# Altium PCB 15WFlyBack.PcbDoc
Units mm, origin at the board's own origin, x right, y up, seen from the top; angles counter-clockwise.
Board outline 88.01 x 41.4 mm, 2 copper layers (Top Layer, Bottom Layer); 49 components, 28 nets, 117 pads, 0 vias.
Unrouted connection lines stored in the file: 86.
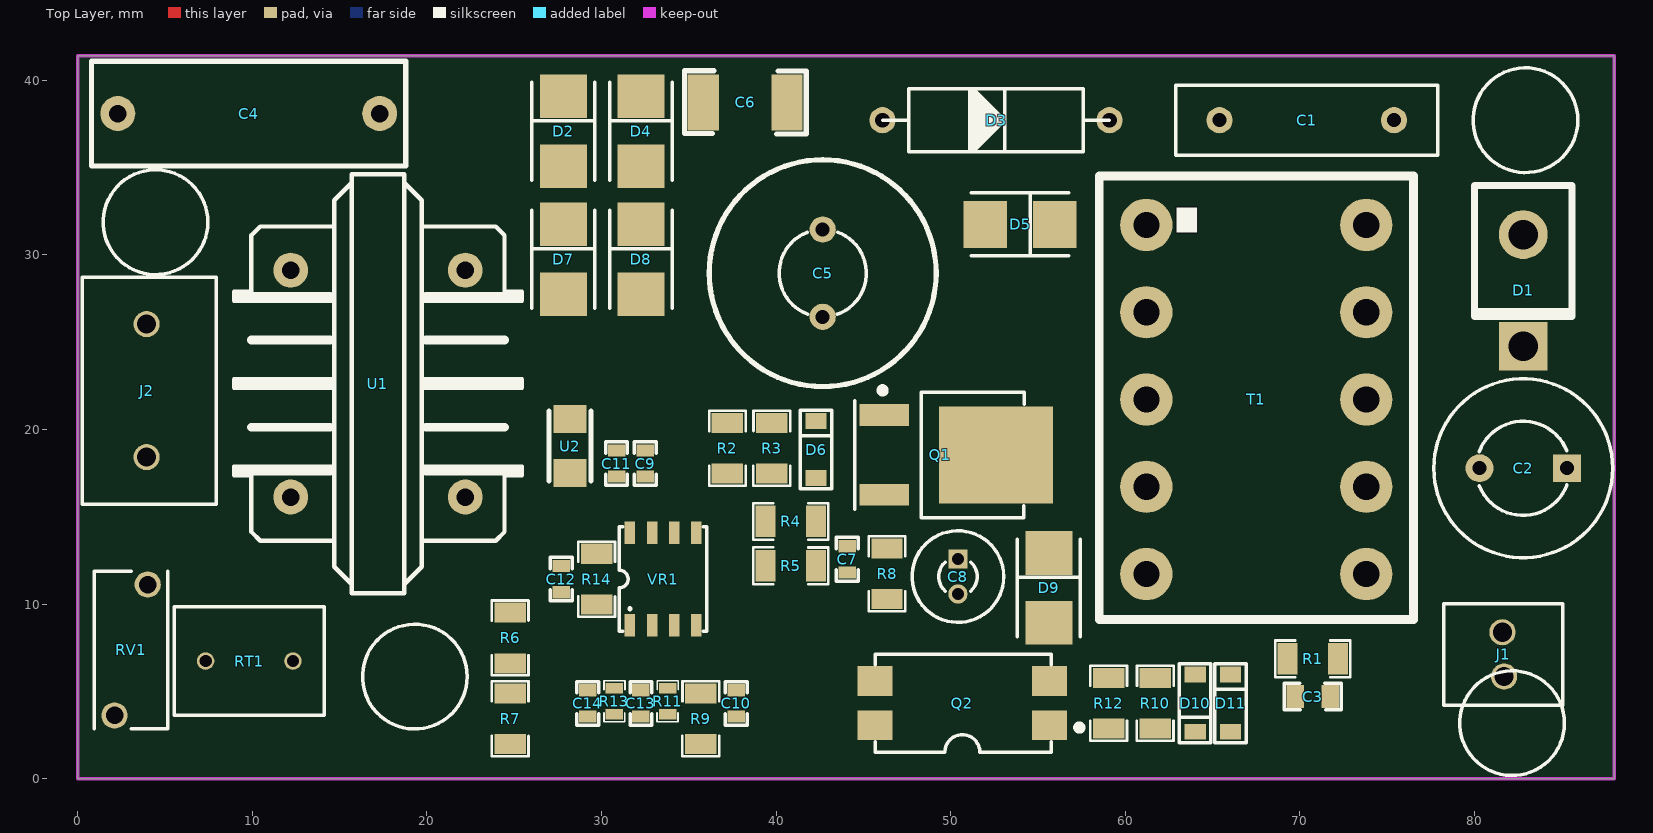
[diagram p0: Top Layer view]
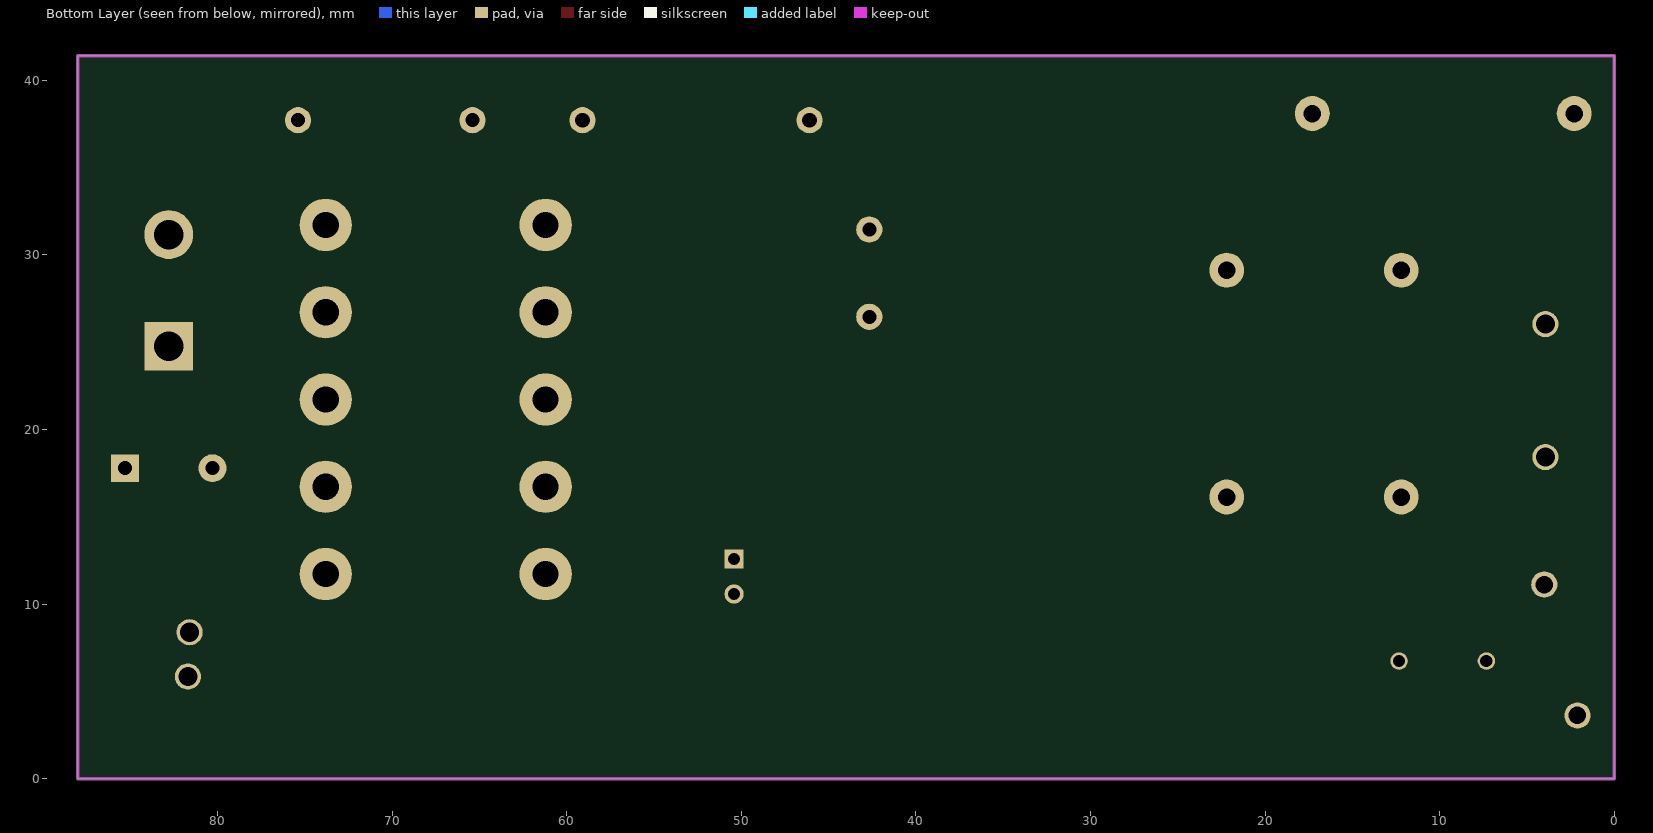
[diagram p1: Bottom Layer view, seen from below]

## Layer stack, top to bottom
Top Solder: solder mask 0.0102, Solder Resist, Dk 3.5
Top Layer: signal copper 0.0356
Dielectric 1: dielectric 0.32, FR-4, Dk 4.8
Bottom Layer: signal copper 0.0356
Bottom Solder: solder mask 0.0102, Solder Resist, Dk 3.5

## Board outline
0,0 88.011,0 88.011,41.402 0,41.402

## Design rules (kind name [scope] priority, off if disabled: settings)
Clearance GenelClearance [All] p1: gap=0.3 ignorepadtopadclearanceinfootprint=FALSE except(0: Arc-Hole Track-Hole SMDPad-Hole THPad-Hole Via-Hole Fill-Hole Poly-Hole Region-Hole Text-Hole)
Clearance NoNet [InNet('No Net')] p2: gap=0.6 ignorepadtopadclearanceinfootprint=FALSE except(0: Arc-Hole Track-Hole SMDPad-Hole THPad-Hole Via-Hole Fill-Hole Poly-Hole Region-Hole Text-Hole)
Clearance Pad-Pad [(IsPad or IsVia) vs (IsPad or IsVia)] p3: gap=0.6 ignorepadtopadclearanceinfootprint=FALSE except(0: Arc-Hole Track-Hole SMDPad-Hole THPad-Hole Via-Hole Fill-Hole Poly-Hole Region-Hole Text-Hole)
Clearance İzole [InNetClass('İzole') vs not InNetClass('İzole')] p4: gap=5 ignorepadtopadclearanceinfootprint=FALSE
Clearance KeepOutLayer [OnLayer('Keep-Out Layer')] p5: gap=0.6 ignorepadtopadclearanceinfootprint=FALSE
Clearance YüksekGerilim [InNetClass('YG') vs InNetClass('YG') or InNetClass('AG')] p6: gap=2.5 ignorepadtopadclearanceinfootprint=FALSE
Clearance İzole-İzole [InNetClass('İzole') vs InNetClass('İzole')] p7: gap=0.5 ignorepadtopadclearanceinfootprint=FALSE
Clearance DCLinkDrienç [InNetClass('DC_Bara_Direnc') vs InNetClass('DC_Bara_Direnc')] p8: gap=1 ignorepadtopadclearanceinfootprint=FALSE
Height [All] p1: minheight=0 maxheight=35 prefheight=12.7
HoleSize [All] p1: absolutevalues=TRUE maxlimit=8 minlimit=0.025 maxpercent=80.000 minpercent=20.000
HoleToHoleClearance [All] p1: gap=0 allowstackedmicrovias=TRUE
MinimumSolderMaskSliver [All] p1: minsoldermaskwidth=0
PlaneConnect [All] p1: planeconnectstyle=Direct reliefexpansion=0.508 reliefentries=4 reliefconductorwidth=0.254 reliefairgap=0.254
PolygonConnect [All] p1: connectstyle=Direct reliefconductorwidth=0.254 reliefentries=4 polygonreliefangle="90 Angle" airgapwidth=0.254
RoutingVias [All] p1: holewidth=0.711 width=1.27 viastyle="Through Hole" minholewidth=0.711 minwidth=1.27 maxholewidth=0.711 maxwidth=1.27
SilkToSilkClearance [All] p1: silktosilkclearance=0
SilkToSolderMaskClearance [IsPad] p1: minsilkscreentomaskgap=0 clearancetoexposedcopper=TRUE
SolderMaskExpansion [All] p1: expansion=0.102 istentingtop=TRUE
Width [All] p1: maxlimit=0.254 minlimit=0.254 preferedwidth=0.254
23 further rules are at their usual default settings.

## Classes and differential pairs
net class İzole: 5V 15V 15V_Kontrol E Gate GND Iolc NetC10_1 NetC12_2 NetC13_2 NetD1_1 NetD10_1 NetD10_2 NetQ2_2 Vfb
net class YG: D(+) NetC4_1 NetC4_2 NetD2_1 NetD3_2 NetD4_1 NetD5_1 NetJ2_2
net class DC_Bara_Direnc: D(+) NetR6_2 NetR7_2
net class AG: E Iolc NetC7_2 NetD6_2 NetD9_1

## Components (designator, comment, footprint, x,y, rotation, side; value= is the part's Value field where it differs from the comment)
C1 "495-4967-1-ND" Y2-CAP 70.405,37.719 r0 top value=2.2nF
C2 "860040475008" CAPPRD500W60D1025H1750 82.804,17.78 r180 top value=470uF
C3 "CL21B105KBFNNNE" CAP-0805 70.739,4.699 r180 top value=1uF
C4 "MPX154K305E" X2-CAP 9.786,38.1 r0 top value=150nF
C5 "C 22uF 400 270mArms" "22UF 400V" 42.672,28.956 r90 top value=22uF
C6 "C1812C104KDRAC7800" CAP-1812 38.227,38.735 r180 top value=100nF
C7 "CC0603KRX7R8BB104" CAP-0603 44.069,12.561 r90 top value=100nF
C8 "1189-1590-1-ND" CAPPRD200W50D525H1250 50.419,11.573 r270 top value=47uF
C9 "CC0603KRX7R8BB104" CAP-0603 32.512,18.048 r270 top value=100nF
C10 "KGM15AR71E222JT" CAP-0603 37.719,4.304 r270 top value=2.2nF
C11 "CC0603KRX7R8BB104" CAP-0603 30.861,18.048 r90 top value=100nF
C12 "CC0603KRX7R8BB104" CAP-0603 27.686,11.43 r90 top value=100nF
C13 "KGM15ACG1E221JT" CAP-0603 32.258,4.304 r90 top value=220pF
C14 "CC0603KRX7R8BB104" CAP-0603 29.21,4.304 r90 top value=100nF
D1 "MUR460RLG" DO-201AD-TO 82.804,27.964 r270 top
D2 "1N4007FLTR" DO-214AAC(SMB) 27.813,37.084 r90 top
D3 "P6KE200" TO-P6KE 52.601,37.719 r0 top
D4 "1N4007FLTR" DO-214AAC(SMB) 32.258,37.084 r90 top
D5 "US1M" DO-214AAC(SMB) 53.975,31.75 r0 top
D6 "ZENER" SOD-123 42.291,18.852 r90 top
D7 "1N4007FLTR" DO-214AAC(SMB) 27.813,29.75 r90 top
D8 "1N4007FLTR" DO-214AAC(SMB) 32.258,29.75 r90 top
D9 "ES2D" DO-214AAC(SMB) 55.626,10.922 r90 top value=25pF
D10 "ZENER" SOD-123 64.008,4.318 r270 top
D11 "ZENER" SOD-123 66.04,4.318 r90 top
J1 "691210910002" CONN-TENMİNAL-BLOCK-DC 81.661,7.112 r90 top
J2 "691214410002" CONN-TERMİNAL-BLOCK-AC 3.937,22.225 r270 top
Q1 "NTD360N80S3Z" TO-252-MOSFET 49.403,18.542 r270 top
Q2 "PC817X" PC817-SMD 50.673,4.318 r180 top
R1 "RMCF1206JT2K20" RES-1206 70.739,6.858 r180 top value=2.2KR
R2 "RMCF1206JT22R0" RES-1206 37.211,18.923 r90 top value=22R
R3 "RC1206JR-074K7L" RES-1206 39.751,18.923 r90 top value=4.7KR
R4 "RMCF1206JT2K20" RES-1206 40.841,14.732 r0 top value=2.2KR
R5 "RMCF1206JT2K20" RES-1206 40.841,12.192 r0 top value=2.2KR
R6 "RC1206JR-07100KL" RES-1206 24.765,8.054 r270 top value=100KR
R7 "RC1206JR-07100KL" RES-1206 24.765,3.429 r270 top value=100KR
R8 "RC1206JR-07100KL" RES-1206 46.355,11.737 r90 top value=100KR
R9 "RC1206JR-073K3L" RES-1206 35.687,3.429 r270 top value=3.3KR
R10 "RMCF1206JT510R" RES-1206 61.722,4.318 r90 top value=510R
R11 "ESR03EZPJ102" RES-0603 33.782,4.429 r90 top value=1kR
R12 "RC1206JR-074K7L" RES-1206 59.055,4.318 r90 top value=4.7KR
R13 "ESR03EZPJ102" RES-0603 30.734,4.429 r90 top value=1kR
R14 "RC1206JR-07100KL" RES-1206 29.718,11.43 r90 top value=100KR
RT1 "B57153S0160M051" NTC-TO 9.819,6.731 r0 top value=16R
RV1 "B72214S0301K101" VARİSTOR 3.048,7.366 r90 top
T1 "SMPS Tr" SMPS-TR3 61.214,31.717 r0 top
U1 "B82732R2701B030" CMC 17.192,22.629 r90 top value=39mH
U2 "50R 100MHz" BEAD-1206 28.194,19.048 r270 top
VR1 "UC3842B" SOP-8-UC 33.528,11.43 r0 top

## Footprints (in the part's own frame and the unit in brackets; to place one, negate y for a bottom-side part, rotate by r counter-clockwise, add the part's x,y. Pads: shape width x height; smd on the part's side, far side on the other; paste and mask are expansions set on the pad)
"22UF 400V" [mm]
  round 1.5 hole 0.8 mask+0.05: 1(-2.5,0) 2(2.5,0)
  silkscreen extent -6.5,-6.5 6.5,6.5, body extent -6.5,-6.5 6.49,6.5, height 21.11
BEAD-1206 [mm]
  rect 1.6x1.9 smd: 1(-1.55,0) 2(1.55,0)
  silkscreen extent -2,-1.2 2,1.2, body extent -1.6,-0.8 1.6,0.8, height 1.3
CAP-0603 [mm]
  rect 0.7x1 smd mask+0.05: 1(-0.75,0) 2(0.75,0)
  silkscreen extent -1.25,-0.63 1.25,0.63, body extent -1.05,-0.51 1.05,0.51, height 0.8
CAP-0805 [mm]
  rect 1x1.3 smd mask+0.05: 1(-1,0) 2(1,0)
  silkscreen extent -1.63,-0.75 1.63,0.75, body extent -1.3,-0.68 1.3,0.68, height 0.9
CAP-1812 [mm]
  rect 1.8x3.2 smd mask+0.05: 1(-2.4,0) 2(2.4,0)
  silkscreen extent -3.5,-1.81 3.48,1.8, body extent -2.25,-1.6 2.25,1.6, height 1.85
CAPPRD200W50D525H1250 [mm]
  rect 1.1x1.1 hole 0.7: 1(-1,0)
  round 1.1 hole 0.7: 2(1,0)
  silkscreen extent -2.62,-2.62 2.62,2.63, body extent -2.48,-2.5 2.51,2.5, height 11.31
CAPPRD500W60D1025H1750 [mm]
  rect 1.6x1.6 hole 0.8: 1(-2.5,0)
  round 1.6 hole 0.8: 2(2.5,0)
  silkscreen extent -5.13,-5.12 5.13,5.12, body extent -4.98,-5 5,5, height 20.26
CMC [mm]
  round 2 hole 1: 1(-6.5,5) 2(6.5,5) 3(6.5,-5) 4(-6.5,-5)
  silkscreen extent -12,-8.25 12,8.25, body extent -12.05,-8.25 11.95,8.25, height 23.6
CONN-TENMİNAL-BLOCK-DC [mm]
  round 1.5 hole 1.1 mask+0.05: 1(-1.27,-0.05) 2(1.27,0.05)
  silkscreen extent -2.9,-3.4 2.9,3.4, body extent -2.74,-3.25 2.74,3.25, height 10.05
CONN-TERMİNAL-BLOCK-AC [mm]
  round 1.5 hole 1.1 mask+0.05: 1(-3.81,0) 2(3.81,0)
  silkscreen extent -6.5,-3.7 6.5,4, body extent -5.72,-3.5 6.31,3.8, height 10.1
DO-201AD-TO [mm]
  round 2.8 hole 1.7: 1(-3.199,0)
  rect 2.8x2.8 hole 1.7: 2(3.199,0)
  silkscreen extent -6,-2.8 1.5,2.8, body extent -6,-2.8 3.89,2.8, height 15.69
DO-214AAC(SMB) [mm]
  rect 2.5x2.7 smd mask+0.05: 1(-2,0) 2(2,0)
  silkscreen extent -2.8,-1.8 2.8,1.8, body extent -2.7,-1.8 2.7,1.8, height 2.27
NTC-TO [mm]
  round 1 hole 0.7 mask+0.05: 1(-2.5,0) 2(2.5,0)
  silkscreen extent -4.3,-3.1 4.3,3.1, body extent -4.25,-3.1 4.25,3.1, height 13
PC817-SMD [mm]
  rect 2x1.7 smd mask+0.05: 1(-5,1.27) 2(-5,-1.27) 3(5,-1.27) 4(5,1.27)
  silkscreen extent -6.8,-2.8 5,2.8, body extent -5.02,-2.3 5.03,2.3, height 3.88
RES-0603 [mm]
  rect 0.6x1 smd mask+0.05: 1(-0.75,0) 2(0.75,0)
  silkscreen extent -1.17,-0.61 1.18,0.6, body extent -0.99,-0.48 0.99,0.5, height 0.43
RES-1206 [mm]
  rect 1.15x1.8 smd mask+0.05: 1(-1.45,0) 2(1.45,0)
  silkscreen extent -2.15,-1.05 2.14,1.05, body extent -1.98,-0.94 1.98,0.94, height 0.55
SMPS-TR3 [mm]
  round 3 hole 1.5: 0(0,-20) 0(12.6,-15) 0(12.6,-5) 1(0,0) 2(0,-5) 3(0,-10) 4(0,-15) 8(12.6,-20) 8(12.6,-10) 10(12.6,0)
  silkscreen extent -2.7,-22.6 15.3,2.8, body extent -2.68,-22.61 15.32,2.79, height 32.65
SOD-123 [mm] "SOD-123"
  rect 0.91x1.22 smd: 1(-1.637,0) 2(1.637,0)
  silkscreen extent -2.26,-0.9 2.26,0.9, body extent -1.94,-0.85 1.91,0.85, height 1.42
SOP-8-UC [mm]
  rect 0.6x1.27 smd mask+0.05: 1(-1.905,-2.65) 2(-0.635,-2.65) 3(0.635,-2.65) 4(1.905,-2.65) 5(1.905,2.65) 6(0.635,2.65) 7(-0.635,2.65) 8(-1.905,2.65)
  silkscreen extent -2.5,-3 2.5,3, body extent -2.49,-3.02 2.41,2.96, height 1.55
TO-252-MOSFET [mm]
  rect 5.55x6.55 smd mask+0.05: D(0,3.2)
  rect 1.25x2.85 smd mask+0.05: G(-2.286,-3.2) S(2.286,-3.2)
  silkscreen extent -3.8,-4.9 3.6,4.81, body extent -3.24,-4.35 3.3,5.55, height 2.52
TO-P6KE [mm]
  round 1.5 hole 0.85 mask+0.05: 1(-6.5,0) 2(6.5,0)
  silkscreen extent -6.5,-1.8 6.5,1.8, body extent -6.9,-1.77 6.86,1.77, height 3.52
VARİSTOR [mm]
  round 1.5 hole 1 mask+0.05: 1(-3.75,0.95) 2(3.75,-0.95)
  silkscreen extent -4.5,-2.1 4.5,2.1, body extent -7.5,-1.8 7.5,1.8, height 22.5
X2-CAP [mm]
  round 2 hole 1: 1(-7.5,0) 2(7.5,0)
  silkscreen extent -9,-3 9,3, body extent -9,-3 9,3, height 12.1
Y2-CAP [mm]
  round 1.5 hole 0.8 mask+0.05: 1(-5,0) 2(5,0)
  silkscreen extent -7.5,-2 7.5,2, body extent -7.5,-2 7.5,2, height 9

## Part data
C1: library part "Cap Y2 2.2nF 300V MKP TDK", "Film Capacitor, Polypropylene, 1500V, 20% +Tol, 20% -Tol, 0.0022uF, Through Hole Mount", Manufacturer="TDK EPCOS", Manufacturer Part Number=B32021A3222M189, Supplier Part Number=2525309, Category="Film Capacitors", ComponentLink1Description=https://datasheet.ciiva.com/26855/getdatasheetpartid-407539-26855093.pdf?src-supplier=Verical, ComponentLink1URL=https://datasheet.ciiva.com/26855/getdatasheetpartid-407539-26855093.pdf?src-supplier=Verical, ComponentLink2Description=https://datasheet.ciiva.com/7614/y2-b32021-026-7614902.pdf?src-supplier=Digikey, ComponentLink2URL=https://datasheet.ciiva.com/7614/y2-b32021-026-7614902.pdf?src-supplier=Digikey, Lead Free=5697LeadFree, Parameter 1=Y2, Pricing="1=0,423, 50=0,366, 100=0,309, 250=0,282, 500=0,255 (EUR)", RoHS=Yes, Stock=6753, Supplier=Farnell
C2: library part "CAP 470uF 35V 1.76A 28mOhm", "WCAP-ATUL Aluminum Electrolytic Capacitors", Manufacturer="Wurth Electronics", Supplier Part Number=2495092, Category="Aluminum Electrolytic Capacitors", ComponentLink1Description=http://www.farnell.com/datasheets/1958393.pdf?src-supplier=Farnell, ComponentLink1URL=http://www.farnell.com/datasheets/1958393.pdf?src-supplier=Farnell, ComponentLink2Description=http://www.produktinfo.conrad.com/datenblaetter/1200000-1299999/001281119-da-01-en-WCAP_ATUL_ALU_ELEC_CAPS_860040475008.pdf?src-supplier=Conrad, ComponentLink2URL=http://www.produktinfo.conrad.com/datenblaetter/1200000-1299999/001281119-da-01-en-WCAP_ATUL_ALU_ELEC_CAPS_860040475008.pdf?src-supplier=Conrad, ComponentLink3Description=http://katalog.we-online.de/pbs/datasheet/860040475008.pdf?src-supplier=Digikey, ComponentLink3URL=http://katalog.we-online.de/pbs/datasheet/860040475008.pdf?src-supplier=Digikey, ComponentLink4Description=https://katalog.we-online.de/pbs/datasheet/860040475008.pdf?src-supplier=Digikey, ComponentLink4URL=https://katalog.we-online.de/pbs/datasheet/860040475008.pdf?src-supplier=Digikey, ComponentLink5Description=http://www.farnell.com/datasheets/1958393.pdf?src-supplier=Element14, ComponentLink5URL=http://www.farnell.com/datasheets/1958393.pdf?src-supplier=Element14, Manufacturer Part Number=860040475008, Pricing="1=0,614, 10=0,591, 50=0,456, 100=0,397, 200=0,353, 500=0,309, 2500=0,303, 5000=0,297 (EUR)", RoHS=Yes, Stock=471, Supplier=Farnell
C3: library part "C-CER 1uF 50V X7R 0805", "Multilayer Ceramic Capacitor, 1 uF, 50 V, ± 10%, X7R, 0805 [2012 Metric]", Case Code (Metric)=2012, Case Code (Imperial)=0805, Dielectric=X7R, Manufacturer=Samsung, Max Operating Temperature=125°C, Min Operating Temperature=-55°C, Package Quantity=1, Supplier Part Number=3013482, Tolerance=10%, Voltage=50V, Case/Package=0805, Category="Ceramic Capacitors", ComponentLink1Description=https://datasheet.ciiva.com/25800/cl21b105kbfnnne-25800291.pdf?src-supplier=Digikey, ComponentLink1URL=https://datasheet.ciiva.com/25800/cl21b105kbfnnne-25800291.pdf?src-supplier=Digikey, Construction=Flat, Depth=1.25mm, Height=1.25mm, Length=2mm, Manufacturer Part Number=CL21B105KBFNNNE, Material=Ceramic, Mounting Technology="Surface Mount", Packaging="Tape and Reel", Pricing="5=0,063, 50=0,038, 250=0,032, 500=0,027, 1000=0,021 (EUR)", Radiation Hardening=No, RoHS=Yes, RoHS Compliant=Yes, Series=CL, Stock=143392, Supplier=Farnell, Thickness=0.053inch, Voltage Rating=50V, Voltage Rating (DC)=50V, Width=0.049inch
C4: library part "CAP 150nF 305VAC X2", "MPX Boxed Metalized Propylene X2 Class Interference Suppressor Film Capacitors", Manufacturer="Cornell Dubilier", Supplier Part Number=598-MPX154K305E, ComponentLink1Description=http://www.illinoiscapacitor.com/pdf/seriesDocuments/MPX%20series.pdf?src-supplier=Digikey, ComponentLink1URL=http://www.illinoiscapacitor.com/pdf/seriesDocuments/MPX%20series.pdf?src-supplier=Digikey, Manufacturer Part Number=MPX154K305E, Parameter 1=X2, Pricing="1=0,55, 10=0,366, 50=0,366, 100=0,241, 1000=0,159, 10000=0,129 (USD)", RoHS=No, Stock=2208, Supplier=Mouser
C5: library part "CAP 22uF 400V 270mArms", "Cap Aluminum Lytic 22uF 400V 20%( 12.5 X 16mm) Radial 5mm 180mA 2000h 105C", Case/Package=Radial, Manufacturer=Rubycon, Manufacturer Part Number=400AX22MEFC12.5X16, Max Operating Temperature=105°C, Min Operating Temperature=-40°C, Supplier Part Number=232-400AX22MEFC125X1, Tolerance=20%, Voltage Rating=400V, Category="Aluminum Electrolytic Capacitors", ComponentLink1Description=http://www.rubycon.co.jp/en/catalog/e_pdfs/aluminum/Radial_Lead_Alumi_Eng.pdf?src-supplier=Digikey, ComponentLink1URL=http://www.rubycon.co.jp/en/catalog/e_pdfs/aluminum/Radial_Lead_Alumi_Eng.pdf?src-supplier=Digikey, Mounting Technology="Through Hole", Pricing="1=1,01, 10=0,638, 50=0,638, 100=0,52, 1000=0,366, 10000=0,336 (USD)", RoHS=Yes, RoHS Compliant=Yes, Series=AX, Stock=1061, Supplier=Mouser
C6: library part "C-CER 100nF 1KV X7R 1812", "Multilayer Ceramic Capacitor, 0.1 uF, 1000 V, ± 10%, X7R, 1812 [4532 Metric]", Case Code (Metric)=4532, Case Code (Imperial)=1812, Dielectric=X7R, Dielectric Material=4241ConductorMaterial, Manufacturer=KEMET, Manufacturer Part Number=C1812C104KDRACTU, Max Operating Temperature=125°C, Min Operating Temperature=-55°C, Package Quantity=1, Supplier Part Number=80-C1812C104KDRACTU, Tolerance=10%, Voltage Rating=1kV, Case/Package=1812, Category="Ceramic Capacitors", ComponentLink1Description=http://www.farnell.com/datasheets/2746125.pdf?src-supplier=Farnell, ComponentLink1URL=http://www.farnell.com/datasheets/2746125.pdf?src-supplier=Farnell, ComponentLink2Description=http://www.mouser.com/ds/2/212/KEM_C1010_X7R_HV_SMD-1102742.pdf?src-supplier=Mouser, ComponentLink2URL=http://www.mouser.com/ds/2/212/KEM_C1010_X7R_HV_SMD-1102742.pdf?src-supplier=Mouser, ComponentLink3Description=https://datasheet.octopart.com/C1812C104KDRACTU-Kemet-datasheet-65933459.pdf?src-supplier=Element14, ComponentLink3URL=https://datasheet.octopart.com/C1812C104KDRACTU-Kemet-datasheet-65933459.pdf?src-supplier=Element14, ComponentLink4Description=https://datasheet.octopart.com/C1812C104KDRACTU-KEMET-datasheet-103257394.pdf?src-supplier=Farnell, ComponentLink4URL=https://datasheet.octopart.com/C1812C104KDRACTU-KEMET-datasheet-103257394.pdf?src-supplier=Farnell, ComponentLink5Description=https://datasheet.octopart.com/C1812C104KDRACTU-KEMET-datasheet-83562145.pdf?src-supplier=Newark, ComponentLink5URL=https://datasheet.octopart.com/C1812C104KDRACTU-KEMET-datasheet-83562145.pdf?src-supplier=Newark, ComponentLink6Description=https://api.kemet.com/component-edge/download/specsheet/C1812C104KDRAC7800.pdf?src-supplier=Digikey, ComponentLink6URL=https://api.kemet.com/component-edge/download/specsheet/C1812C104KDRAC7800.pdf?src-supplier=Digikey, ComponentLink7Description=https://search.kemet.com/component-edge/download/specsheet/C1812C104KDRAC7800.pdf?src-supplier=Digikey, ComponentLink7URL=https://search.kemet.com/component-edge/download/specsheet/C1812C104KDRAC7800.pdf?src-supplier=Digikey, ComponentLink8Description=http://www.farnell.com/datasheets/2746125.pdf?src-supplier=Newark, ComponentLink8URL=http://www.farnell.com/datasheets/2746125.pdf?src-supplier=Newark, ComponentLink9Description=https://datasheet.octopart.com/C1812C104KDRACTU-KEMET-datasheet-147336162.pdf?src-supplier=TME, ComponentLink9URL=https://datasheet.octopart.com/C1812C104KDRACTU-KEMET-datasheet-147336162.pdf?src-supplier=TME, ComponentLink10Description=https://datasheet.octopart.com/C1812C104KDRACTU-KEMET-datasheet-134136062.pdf?src-supplier=Electro+Sonic, ComponentLink10URL=https://datasheet.octopart.com/C1812C104KDRACTU-KEMET-datasheet-134136062.pdf?src-supplier=Electro+Sonic, Height=1.85mm, Length=0.177inch, Material=4241ConductorMaterial, Mounting Technology="Surface Mount", Packaging="Tape and Reel", Pricing="1=0,71, 10=0,47, 50=0,47, 100=0,354, 1000=0,294, 10000=0,282 (USD)", Reach SVHC Compliant=No, RoHS=Yes, RoHS Compliant=Yes, Series=C, Stock=11645, Supplier=Mouser, Termination=SMD/SMT, Thickness=0.073inch, Voltage Rating (DC)=1kV, Width=0.126inch
C7 C9 C11 C12 C14: library part "C-CER 0.1UF 25V X7R 0603", "Multilayer Ceramic Capacitor, 0.1 uF, 25 V, ± 10%, X7R, 0603 [1608 Metric]", Case Code (Metric)=1608, Case Code (Imperial)=0603, Dielectric=X7R, Manufacturer=Yageo, Max Operating Temperature=125°C, Min Operating Temperature=-55°C, Package Quantity=1, Supplier Part Number=3369240, Tolerance=10%, Voltage=25V, Case/Package=0603, Category="Ceramic Capacitors", ComponentLink1Description=https://datasheet.ciiva.com/144/mlccorderingcode-144075.pdf?src-supplier=Digikey, ComponentLink1URL=https://datasheet.ciiva.com/144/mlccorderingcode-144075.pdf?src-supplier=Digikey, ComponentLink2Description=https://datasheet.ciiva.com/11786/0900766b80c10176-11786120.pdf?src-supplier=Rs, ComponentLink2URL=https://datasheet.ciiva.com/11786/0900766b80c10176-11786120.pdf?src-supplier=Rs, ComponentLink3Description=https://datasheet.ciiva.com/13389/upy-gphc-x7r-6-3v-to-50v-8-13389352.pdf?src-supplier=Mouser, ComponentLink3URL=https://datasheet.ciiva.com/13389/upy-gphc-x7r-6-3v-to-50v-8-13389352.pdf?src-supplier=Mouser, ComponentLink4Description=https://datasheet.ciiva.com/7978/1489800-7978155.pdf?src-supplier=Element14, ComponentLink4URL=https://datasheet.ciiva.com/7978/1489800-7978155.pdf?src-supplier=Element14, ComponentLink5Description=https://datasheet.ciiva.com/28450/1489800-28450584.pdf?src-supplier=Element14, ComponentLink5URL=https://datasheet.ciiva.com/28450/1489800-28450584.pdf?src-supplier=Element14, ComponentLink6Description=https://datasheet.ciiva.com/144/mlccorderingcode-144074.pdf?src-supplier=Digikey, ComponentLink6URL=https://datasheet.ciiva.com/144/mlccorderingcode-144074.pdf?src-supplier=Digikey, ComponentLink7Description=https://datasheet.ciiva.com/144/mlccorderingcode-144073.pdf?src-supplier=Digikey, ComponentLink7URL=https://datasheet.ciiva.com/144/mlccorderingcode-144073.pdf?src-supplier=Digikey, ComponentLink8Description=https://datasheet.ciiva.com/11587/upy-gphc-x7r-6-3v-to-50v-8-11587208.pdf?src-supplier=Avnet, ComponentLink8URL=https://datasheet.ciiva.com/11587/upy-gphc-x7r-6-3v-to-50v-8-11587208.pdf?src-supplier=Avnet, ComponentLink9Description=https://datasheet.ciiva.com/26829/getdatasheetpartid-403577-26829431.pdf?src-supplier=Verical, ComponentLink9URL=https://datasheet.ciiva.com/26829/getdatasheetpartid-403577-26829431.pdf?src-supplier=Verical, Depth=0.8mm, Halogen Free=5694HalogenFree, Height=0.8mm, Lead Free=5697LeadFree, Length=1.6mm, Manufacturer Part Number=CC0603KRX7R8BB104, Material=4241ConductorMaterial, Mounting Technology="Surface Mount", Packaging="Tape and Reel", Pins=2, Pricing="10=0,026, 100=0,015, 500=0,012, 1000=0,01, 2000=0,0098 (EUR)", Radiation Hardening=No, Reach SVHC Compliant=Unknown, RoHS=Yes, RoHS Compliant=Yes, Series=CC, Stock=1312755, Supplier=Farnell, Termination=SMD/SMT, Thickness=0.035inch, Voltage Rating=25V, Voltage Rating (DC)=25V, Width=0.031inch
C8: library part "CAP 47uF 25V 250mArms 400mOhm", "RUBYCON         25YXJ47MTA5X11            Electrolytic Capacitor, Miniature, YXJ Series, 47 F,  20%, 25 V, 5 mm, Radial Leaded", Case/Package=Radial, Manufacturer=Rubycon, Manufacturer Part Number=25YXJ47MTA5X11, Max Operating Temperature=105°C, Min Operating Temperature=-40°C, Package Quantity=2000, Ripple Current=175mA, Supplier Part Number=2346258, Tolerance=20%, Voltage Rating=25V, Category="Aluminum Electrolytic Capacitors", ComponentLink1Description=https://datasheet.ciiva.com/6328/e-yxj-6328843.pdf?src-supplier=Digikey, ComponentLink1URL=https://datasheet.ciiva.com/6328/e-yxj-6328843.pdf?src-supplier=Digikey, ComponentLink2Description=https://datasheet.ciiva.com/22732/1657883-22732557.pdf?src-supplier=Element14, ComponentLink2URL=https://datasheet.ciiva.com/22732/1657883-22732557.pdf?src-supplier=Element14, Diameter=5mm, Features="General Purpose", Height=11mm, Height - Seated (Max)=0.492inch, Lead Pitch=0.079inch, Mounting Technology="Through Hole", Packaging="Cut Tape", Pricing="5=0,121, 50=0,079, 250=0,068, 500=0,063, 1500=0,059, 3000=0,053, 15000=0,052, 30000=0,051 (EUR)", Reach SVHC Compliant=No, RoHS=Yes, RoHS Compliant=Yes, Series=YXJ, Stock=3896, Supplier=Farnell, Voltage Rating (DC)=25V, Impedance=400mR
C10: library part "C-CER 2.2nF 25V X7R 0603", "CAP CER 2200PF 25V X7R 0603", Manufacturer="Kyocera AVX", Supplier Part Number=581-KGM15AR71E222JT, Manufacturer Part Number=KGM15AR71E222JT, Pricing="1=0,1, 10=0,039, 50=0,039, 100=0,019, 1000=0,012, 10000=0,01 (USD)", RoHS=No, Stock=15998, Supplier=Mouser
C13: library part "C-CER 220pF 25V C0G/NP0 0603", "CAP CER 220PF 25V C0G/NP0 0603", Manufacturer="Kyocera AVX", Supplier Part Number=478-KGM15ACG1E221JTCT-ND, Manufacturer Part Number=KGM15ACG1E221JT, Pricing="1=0,1, 10=0,04, 50=0,0228, 100=0,0177, 500=0,01334, 1000=0,01048 (USD)", RoHS=No, Stock=129544, Supplier=Digikey
D1: library part "Diyot DO-201AD Dik", "VR=600V IF=4A Trr=75ns", Manufacturer="ON Semiconductor", Category="Rectifier Diodes", ComponentLink1Description=https://datasheet.ciiva.com/8292/mur420-d-8292330.pdf?src-supplier=Avnet, ComponentLink1URL=https://datasheet.ciiva.com/8292/mur420-d-8292330.pdf?src-supplier=Avnet, ComponentLink2Description=https://datasheet.ciiva.com/8299/mur420-d-8299765.pdf?src-supplier=Avnet, ComponentLink2URL=https://datasheet.ciiva.com/8299/mur420-d-8299765.pdf?src-supplier=Avnet, ComponentLink3Description=https://datasheet.ciiva.com/22659/1708324-22659094.pdf?src-supplier=Element14, ComponentLink3URL=https://datasheet.ciiva.com/22659/1708324-22659094.pdf?src-supplier=Element14, ComponentLink4Description=https://datasheet.ciiva.com/916/mur420-d-916026.pdf?src-supplier=Digikey, ComponentLink4URL=https://datasheet.ciiva.com/916/mur420-d-916026.pdf?src-supplier=Digikey, ComponentLink5Description=https://datasheet.ciiva.com/916/mur420-d-916027.pdf?src-supplier=Digikey, ComponentLink5URL=https://datasheet.ciiva.com/916/mur420-d-916027.pdf?src-supplier=Digikey, Manufacturer Part Number=MUR460RLG, Pricing="1500=0,256, 3000=0,2262, 7500=0,2123, 10500=0,1948, 37500=0,191 (USD)", RoHS=Yes, Stock=76500, Supplier="Arrow Electronics", Supplier Part Number=MUR460RLG
D2 D4 D7 D8: library part "D 1N4007 DO-214AA(SMB)", "Standard Rectifier 1000V SOD-123", Manufacturer=SMC, Supplier Part Number=8135663, Manufacturer Part Number=1N4007FLTR, Pricing="3000=0,014, 12000=0,0134, 45000=0,0129, 120000=0,0125, 300000=0,0119 (USD)", RoHS=No, Supplier="Future Electronics"
D3: library part "TVS DO15 162V 600W UNIDIR", "Diode TVS Single Bi-Directional 171V 600W 2-Pin DO-15 - Tape and Reel", Forward Voltage=1V, Manufacturer="Taiwan Semiconductor", Manufacturer Part Number=P6KE200CA, Max Breakdown Voltage=210V, Max Forward Surge Current (Ifsm)=2.5A, Max Repetitive Reverse Voltage (Vrrm)=250V, Power Dissipation=200mW, Supplier Part Number=821-P6KE200CA, Category="TVS Diodes", ComponentLink1Description=http://uk.rs-online.com/webdocs/0dae/0900766b80dae633.pdf?src-supplier=Rs, ComponentLink1URL=http://uk.rs-online.com/webdocs/0dae/0900766b80dae633.pdf?src-supplier=Rs, ComponentLink2Description=http://datasheet.octopart.com/P6KE200CA-Taiwan-Semiconductor-datasheet-62315087.pdf?src-supplier=Verical, ComponentLink2URL=http://datasheet.octopart.com/P6KE200CA-Taiwan-Semiconductor-datasheet-62315087.pdf?src-supplier=Verical, ComponentLink3Description=http://datasheet.octopart.com/P6KE200CA-Taiwan-Semiconductor-datasheet-62315087.pdf?src-supplier=Digikey, ComponentLink3URL=http://datasheet.octopart.com/P6KE200CA-Taiwan-Semiconductor-datasheet-62315087.pdf?src-supplier=Digikey, ComponentLink4Description=http://datasheet.octopart.com/P6KE200CA-Taiwan-Semiconductor-datasheet-62315087.pdf?src-supplier=Mouser, ComponentLink4URL=http://datasheet.octopart.com/P6KE200CA-Taiwan-Semiconductor-datasheet-62315087.pdf?src-supplier=Mouser, ComponentLink5Description=http://datasheet.octopart.com/P6KE200CA-Taiwan-Semiconductor-datasheet-62315087.pdf?src-supplier=Arrow+Electronics, ComponentLink5URL=http://datasheet.octopart.com/P6KE200CA-Taiwan-Semiconductor-datasheet-62315087.pdf?src-supplier=Arrow+Electronics, ComponentLink6Description=http://datasheet.octopart.com/P6KE200CA-Taiwan-Semiconductor-datasheet-62315087.pdf?src-supplier=Avnet, ComponentLink6URL=http://datasheet.octopart.com/P6KE200CA-Taiwan-Semiconductor-datasheet-62315087.pdf?src-supplier=Avnet, ComponentLink7Description=http://datasheet.octopart.com/P6KE200CA-Taiwan-Semiconductor-datasheet-62315087.pdf?src-supplier=Farnell, ComponentLink7URL=http://datasheet.octopart.com/P6KE200CA-Taiwan-Semiconductor-datasheet-62315087.pdf?src-supplier=Farnell, ComponentLink8Description=http://docs-usa.electrocomponents.com/techlib:/itc_doclist_US.htm?stockno=6873857&src-supplier=Allied+Electronics, ComponentLink8URL=http://docs-usa.electrocomponents.com/techlib:/itc_doclist_US.htm?stockno=6873857&src-supplier=Allied+Electronics, ComponentLink9Description=http://datasheet.octopart.com/P6KE200CA-Taiwan-Semiconductor-datasheet-62315087.pdf?src-supplier=Rs, ComponentLink9URL=http://datasheet.octopart.com/P6KE200CA-Taiwan-Semiconductor-datasheet-62315087.pdf?src-supplier=Rs, Designed By="Arda B.", Pricing="1=0,43, 10=0,354, 50=0,354, 100=0,222, 1000=0,14, 10000=0,109 (USD)", Reach SVHC Compliant=4186SVHC, Reverse Recovery Time=50ns, RoHS=Yes, Stock=2424, Supplier=Mouser
D5: library part "D 1KV 1A DO214AC SMA", "Diode Ultra Fast Recovery Rectifier 1K Volt 1A 2-Pin SMA Tape and Reel", Manufacturer=Diodes, Manufacturer Part Number=US1M-13-F, Reverse Voltage=1kV, Supplier Part Number=7135234, Category="Rectifier Diodes", ComponentLink1Description=https://datasheet.ciiva.com/27052/1542696-27052440.pdf?src-supplier=Jameco, ComponentLink1URL=https://datasheet.ciiva.com/27052/1542696-27052440.pdf?src-supplier=Jameco, ComponentLink2Description=https://datasheet.ciiva.com/4454/ds16008-60440-4454096.pdf?src-supplier=Mouser, ComponentLink2URL=https://datasheet.ciiva.com/4454/ds16008-60440-4454096.pdf?src-supplier=Mouser, ComponentLink3Description=https://datasheet.ciiva.com/917/ds16008-917195.pdf?src-supplier=Digikey, ComponentLink3URL=https://datasheet.ciiva.com/917/ds16008-917195.pdf?src-supplier=Digikey, ComponentLink4Description=https://datasheet.ciiva.com/917/ds16008-917196.pdf?src-supplier=Digikey, ComponentLink4URL=https://datasheet.ciiva.com/917/ds16008-917196.pdf?src-supplier=Digikey, ComponentLink5Description=https://datasheet.ciiva.com/8301/ds16008-8301519.pdf?src-supplier=Avnet, ComponentLink5URL=https://datasheet.ciiva.com/8301/ds16008-8301519.pdf?src-supplier=Avnet, ComponentLink6Description=https://datasheet.ciiva.com/22695/1906610-22695853.pdf?src-supplier=Element14, ComponentLink6URL=https://datasheet.ciiva.com/22695/1906610-22695853.pdf?src-supplier=Element14, ComponentLink7Description=https://datasheet.ciiva.com/8303/ds16008-8303103.pdf?src-supplier=Avnet, ComponentLink7URL=https://datasheet.ciiva.com/8303/ds16008-8303103.pdf?src-supplier=Avnet, Designed By="Arda B.", Pricing="5000=0,0385, 15000=0,0371, 20000=0,0367, 50000=0,0356, 75000=0,0345 (USD)", RoHS=Yes, Stock=5935000, Supplier="Future Electronics"
D6 D10 D11: library part "Zener SOD-123", "SOD-123", Manufacturer=Murata, Manufacturer Part Number=GRM2165C2A822JA01D, Supplier Part Number=81-GRM2165C2A822JA1D, Category="Ceramic Capacitors", Designed By="Arda B.", Pricing="1=0,17, 10=0,107, 50=0,107, 100=0,054, 1000=0,035, 10000=0,026 (USD)", RoHS=Yes, Stock=3147, Supplier=Mouser
D9: library part "D GEN PURP 200V 2A DO214AA", "ES2DFSCT-ND", Average Rectified Current=2A, Case/Package=SMA, Diode Capacitance-Max=25pF, Forward Voltage=920mV, Manufacturer=Diodes, Manufacturer Part Number=ES2DA-13-F, Max Operating Temperature=150°C, Max Repetitive Reverse Voltage (Vrrm)=200V, Max Reverse Current=5uA, Max Surge Current=50A, Min Operating Temperature=-55°C, Natural Thermal Resistance=20°C/W, Package Body Material=Plastic, Package Quantity=5000, Package Shape=Rectangular, Peak Reflow Temperature (Cel)=245°C, Supplier Part Number=ES2DA-FDICT-ND, Time @ Peak Reflow Temperature-Max (s)=5s, Application(s)=EFFICIENCY, Category="Rectifier Diodes", Current Rating=2A, Designed By="Arda B.", Diode Element Material=SILICON, Diode Type=RECTIFIER, Forward Current=2A, Height=2.1mm, JESD-30 Code=R-PDSO-C2, Lead Free="Lead Free", Length=4.6mm, Max Reverse Voltage (DC)=200V, Moisture Sensitivity Level=1, Mounting Technology="Surface Mount", Number of Elements=1, Number of Phases=1, Output Current=2A, Packaging="Tape and Reel", Peak Non-Repetitive Surge Current=50A, Pins=2, Polarity=Standard, Pricing="1=0,49, 10=0,382, 100=0,2291, 500=0,2121, 1000=0,14423, 2000=0,13278 (USD)", Radiation Hardening=No, Recovery Time=25ns, Reverse Recovery Time=25ns, Reverse Recovery Time-Max=25ns, Reverse Voltage (DC)=200V, RoHS=Yes, RoHS Compliant=Yes, Series=-, Stock=395285, Supplier=Digikey, Surface Mount=Yes, Terminal Finish=Tin, Terminal Form="C BEND", Terminal Position=DUAL, Termination=SMD/SMT, Voltage Rating (DC)=200V, Weight=0.002258oz, Width=2.92mm
J1: library part "TERM BLOCK 2P HORIZON 2.54MM PCB", "Tb, Wire To Brd, R/A, 2Way, 18Awg Rohs Compliant: Yes", Color=Green, Current=6A, Manufacturer="Wurth Electronics", Max Operating Temperature=105°C, Min Operating Temperature=-40°C, Supplier Part Number=710-691210910002, Voltage=150V, Category="Terminal Blocks", ComponentLink1Description=https://katalog.we-online.de/em/datasheet/6912109100xx.pdf?src-supplier=Digikey, ComponentLink1URL=https://katalog.we-online.de/em/datasheet/6912109100xx.pdf?src-supplier=Digikey, Contact Material=154ConductorMaterial, Contact Plating=Brass,Tin, Current Rating=6A, Designed By="Arda B.", Height=8.7mm, Housing Material=Nylon, Manufacturer Part Number=691210910002, Mounting Technology="Through Hole", Number of Contacts=2NUMBER, Number of Levels=1, Number of Positions Per Level=2, Number of Rows=1NUMBER, Plating=Brass,Steel, Pricing="1=1,14, 10=1,04, 50=0,984, 100=0,905, 1000=0,748, 10000=0,747 (USD)", RoHS=Yes, RoHS Compliant=Yes, Series="WR-TBL Series 2109", Stock=14926, Supplier=Mouser, Termination=Screw, Voltage Rating=150V, Wire Gauge (Max)=30AWG, Wire Gauge (Min)=18AWG
J2: library part "TERMINAL BLOCK 7.62MM HORIZONT", "7.62 Mm Terminal Block, Horizont", Manufacturer="Wurth Electronics", Supplier Part Number=710-691214410002, Category="Terminal Blocks", ComponentLink1Description=https://katalog.we-online.de/em/datasheet/6912144100xx.pdf?src-supplier=Digikey, ComponentLink1URL=https://katalog.we-online.de/em/datasheet/6912144100xx.pdf?src-supplier=Digikey, Designed By="Arda B.", Manufacturer Part Number=691214410002, Pricing="1=1,27, 10=1,14, 50=1,05, 100=0,97, 1000=0,722, 10000=0,722 (USD)", RoHS=No, Stock=496, Supplier=Mouser
Q1: library part "MOSFET N-CH 800V 13A DPAK", "MOSFET – Power, N-Channel, SUPERFET® III, 800 V, 13 A, 360 mΩ, DPAK", Manufacturer="ON Semiconductor", Supplier Part Number=3528500, Category=MOSFETs, Designed By="Arda B.", Manufacturer Part Number=NTD360N80S3Z, Pricing="1=3, 10=2,1, 100=1,71, 500=1,62, 2500=1,54, 5000=1,45, 7500=1,36 (EUR)", RoHS=Yes, Stock=1911, Supplier=Farnell
Q2: library part "OPTOISOLATOR 5KV TRANS 4DIP", "DIP-4 Viso=5000Vrms VF(typ)=1.2V IF=50mA Vo=80V", Manufacturer=Sharp, Manufacturer Part Number=PC817X3NSZ9F, Supplier Part Number=852-PC817X3NSZ9F, Designed By="Arda B.", Pricing="1=0,36, 10=0,236, 50=0,236, 100=0,157, 1000=0,09, 10000=0,07 (USD)", RoHS=No, Stock=27271, Supplier=Mouser
R1 R4 R5: library part "RES 2.2K OHM 5% 1/4W 1206", "Res Thick Film 1206 2.2K Ohm 5% 0.25W(1/4W) ±200ppm/C Pad SMD Automotive T/R", Manufacturer="Stackpole Electronics", Supplier Part Number=708-RMCF1206JT2K20, Category="Chip SMD Resistors", ComponentLink1Description=https://datasheet.ciiva.com/15193/getdatasheetpartid-362055-15193733.pdf?src-supplier=Verical, ComponentLink1URL=https://datasheet.ciiva.com/15193/getdatasheetpartid-362055-15193733.pdf?src-supplier=Verical, Manufacturer Part Number=RMCF1206JT2K20, Pricing="1=0,1, 10=0,025, 50=0,025, 100=0,011, 1000=0,005, 10000=0,003 (USD)", RoHS=Yes, Stock=58901, Supplier=Mouser
R2: library part "RES 22 OHM 5% 1/4W 1206", "Res Thick Film 1206 22 Ohm 5% 0.25W(1/4W) ±200ppm/C Pad SMD Automotive T/R", Manufacturer="Stackpole Electronics", Supplier Part Number=708-RMCF1206JT22R0, Category="Chip SMD Resistors", ComponentLink1Description=https://www.verical.com/server-webapp/html/getDatasheet?partID=368660&src-supplier=Verical, ComponentLink1URL=https://www.verical.com/server-webapp/html/getDatasheet?partID=368660&src-supplier=Verical, ComponentLink2Description=http://components.arrow.com/part/dataview/44988449S7077347N1174?src-supplier=Arrow+Electronics, ComponentLink2URL=http://components.arrow.com/part/dataview/44988449S7077347N1174?src-supplier=Arrow+Electronics, ComponentLink3Description=https://www.seielect.com/catalog/sei-rmcf_rmcp.pdf?src-supplier=Digikey, ComponentLink3URL=https://www.seielect.com/catalog/sei-rmcf_rmcp.pdf?src-supplier=Digikey, ComponentLink4Description=https://www.seielect.com/catalog/SEI-Packaging.pdf?src-supplier=Digikey, ComponentLink4URL=https://www.seielect.com/catalog/SEI-Packaging.pdf?src-supplier=Digikey, ComponentLink5Description=https://datasheet.octopart.com/RMCF1206JT22R0-Stackpole-Electronics-datasheet-28504820.pdf?src-supplier=Future+Electronics, ComponentLink5URL=https://datasheet.octopart.com/RMCF1206JT22R0-Stackpole-Electronics-datasheet-28504820.pdf?src-supplier=Future+Electronics, ComponentLink6Description=https://www.seielect.com/catalog/SEI-RMCF_RMCP.pdf?src-supplier=Avnet, ComponentLink6URL=https://www.seielect.com/catalog/SEI-RMCF_RMCP.pdf?src-supplier=Avnet, ComponentLink7Description=http://www.seielect.com/catalog/sei-rmc.pdf?src-supplier=Future+Electronics, ComponentLink7URL=http://www.seielect.com/catalog/sei-rmc.pdf?src-supplier=Future+Electronics, ComponentLink8Description=https://datasheet.octopart.com/RMCF1206JT22R0-Stackpole-Electronics-datasheet-155966809.pdf?src-supplier=Master+Electronics, ComponentLink8URL=https://datasheet.octopart.com/RMCF1206JT22R0-Stackpole-Electronics-datasheet-155966809.pdf?src-supplier=Master+Electronics, Manufacturer Part Number=RMCF1206JT22R0, Pricing="1=0,1, 10=0,022, 50=0,022, 100=0,012, 1000=0,007, 10000=0,004 (USD)", RoHS=Yes, Stock=14781, Supplier=Mouser
R3 R12: library part "RES 4.7K OHM 5% 1/4W 1206", "Res Thick Film 1206 4.7K Ohm 5% 1/4W", Manufacturer=Yageo, Supplier Part Number=9240608, Voltage Rating (AC)=200V, Category="Chip SMD Resistors", ComponentLink1Description=https://datasheet.ciiva.com/2458/pyu-r-int-thick-7-2458638.pdf?src-supplier=Digikey, ComponentLink1URL=https://datasheet.ciiva.com/2458/pyu-r-int-thick-7-2458638.pdf?src-supplier=Digikey, ComponentLink2Description=https://datasheet.ciiva.com/2458/pyu-r-int-thick-7-2458639.pdf?src-supplier=Digikey, ComponentLink2URL=https://datasheet.ciiva.com/2458/pyu-r-int-thick-7-2458639.pdf?src-supplier=Digikey, ComponentLink3Description=https://datasheet.ciiva.com/2458/pyu-r-int-thick-7-2458640.pdf?src-supplier=Digikey, ComponentLink3URL=https://datasheet.ciiva.com/2458/pyu-r-int-thick-7-2458640.pdf?src-supplier=Digikey, ComponentLink4Description=https://datasheet.ciiva.com/7857/444357-7857511.pdf?src-supplier=Element14, ComponentLink4URL=https://datasheet.ciiva.com/7857/444357-7857511.pdf?src-supplier=Element14, ComponentLink5Description=https://datasheet.ciiva.com/7857/444357-7857512.pdf?src-supplier=Element14, ComponentLink5URL=https://datasheet.ciiva.com/7857/444357-7857512.pdf?src-supplier=Element14, Manufacturer Part Number=RC1206JR-074K7L, Pricing="10=0,023, 100=0,014, 500=0,011, 1000=0,009, 2500=0,0088 (EUR)", RoHS=Yes, Stock=8940, Supplier=Farnell
R6 R7 R8 R14: library part "RES 100K OHM 5% 1/4W 1206", "SMD Chip Resistor, 100 kOhm, ± 5%, 250 mW, 1206 [3216 Metric], Thick Film, General Purpose", Manufacturer=Yageo, Supplier Part Number=311-100KERCT-ND, Voltage Rating (AC)=200V, Category="Chip SMD Resistors", ComponentLink1Description=https://datasheet.ciiva.com/2458/pyu-rc1206-51-rohs-l-4-2458650.pdf?src-supplier=Digikey, ComponentLink1URL=https://datasheet.ciiva.com/2458/pyu-rc1206-51-rohs-l-4-2458650.pdf?src-supplier=Digikey, ComponentLink2Description=https://datasheet.ciiva.com/7857/444357-7857423.pdf?src-supplier=Element14, ComponentLink2URL=https://datasheet.ciiva.com/7857/444357-7857423.pdf?src-supplier=Element14, ComponentLink3Description=https://datasheet.ciiva.com/2458/pyu-rc1206-51-rohs-l-4-2458651.pdf?src-supplier=Digikey, ComponentLink3URL=https://datasheet.ciiva.com/2458/pyu-rc1206-51-rohs-l-4-2458651.pdf?src-supplier=Digikey, ComponentLink4Description=https://datasheet.ciiva.com/2458/pyu-rc1206-51-rohs-l-4-2458652.pdf?src-supplier=Digikey, ComponentLink4URL=https://datasheet.ciiva.com/2458/pyu-rc1206-51-rohs-l-4-2458652.pdf?src-supplier=Digikey, Manufacturer Part Number=RC1206JR-07100KL, Pricing="1=0,1, 10=0,035, 50=0,0226, 100=0,0189, 500=0,0131, 1000=0,01133 (USD)", RoHS=Yes, Stock=265648, Supplier=Digikey
R9: library part "RES 3.3K OHM 5% 1/4W 1206", "Res Thick Film 1206 3.3K Ohm 5% 0.25W(1/4W) ±100ppm/°C Pad SMD T/R", Manufacturer=Yageo, Supplier Part Number=9240586, Category="Chip SMD Resistors", ComponentLink1Description=https://datasheet.ciiva.com/29181/402605-da-01-en-smd-widerstand-chip1206-3-3-kohm-29181477.pdf?src-supplier=Conrad, ComponentLink1URL=https://datasheet.ciiva.com/29181/402605-da-01-en-smd-widerstand-chip1206-3-3-kohm-29181477.pdf?src-supplier=Conrad, ComponentLink2Description=https://datasheet.ciiva.com/2458/pyu-r-int-thick-7-2458662.pdf?src-supplier=Digikey, ComponentLink2URL=https://datasheet.ciiva.com/2458/pyu-r-int-thick-7-2458662.pdf?src-supplier=Digikey, ComponentLink3Description=https://datasheet.ciiva.com/2458/pyu-r-int-thick-7-2458663.pdf?src-supplier=Digikey, ComponentLink3URL=https://datasheet.ciiva.com/2458/pyu-r-int-thick-7-2458663.pdf?src-supplier=Digikey, ComponentLink4Description=https://datasheet.ciiva.com/2458/pyu-r-int-thick-7-2458664.pdf?src-supplier=Digikey, ComponentLink4URL=https://datasheet.ciiva.com/2458/pyu-r-int-thick-7-2458664.pdf?src-supplier=Digikey, Manufacturer Part Number=RC1206JR-073K3L, Pricing="10=0,023, 100=0,014, 500=0,011, 1000=0,009, 2500=0,007, 5000=0,005, 25000=0,004, 50000=0,0039 (EUR)", RoHS=Yes, Stock=162725, Supplier=Farnell
R10: library part "RES 510 OHM 5% 1/4W 1206", "Res Thick Film 1206 510 Ohm 5% 0.25W(1/4W) ±200ppm/C Pad SMD Automotive T/R", Manufacturer="Stackpole Electronics", Category="Chip SMD Resistors", ComponentLink1Description=https://www.seielect.com/Catalog/SEI-RMCF_RMCP.pdf?src-supplier=Avnet, ComponentLink1URL=https://www.seielect.com/Catalog/SEI-RMCF_RMCP.pdf?src-supplier=Avnet, ComponentLink2Description=https://www.seielect.com/catalog/sei-rmcf_rmcp.pdf?src-supplier=Digikey, ComponentLink2URL=https://www.seielect.com/catalog/sei-rmcf_rmcp.pdf?src-supplier=Digikey, ComponentLink3Description=https://www.seielect.com/catalog/SEI-Packaging.pdf?src-supplier=Digikey, ComponentLink3URL=https://www.seielect.com/catalog/SEI-Packaging.pdf?src-supplier=Digikey, ComponentLink4Description=https://datasheet.octopart.com/RMCF1206JT510R-Stackpole-Electronics-datasheet-28504820.pdf?src-supplier=Future+Electronics, ComponentLink4URL=https://datasheet.octopart.com/RMCF1206JT510R-Stackpole-Electronics-datasheet-28504820.pdf?src-supplier=Future+Electronics, ComponentLink5Description=https://datasheet.octopart.com/RMCF1206JT510R-Stackpole-Electronics-datasheet-11546843.pdf?src-supplier=Arrow+Electronics, ComponentLink5URL=https://datasheet.octopart.com/RMCF1206JT510R-Stackpole-Electronics-datasheet-11546843.pdf?src-supplier=Arrow+Electronics, Manufacturer Part Number=RMCF1206JT510R, Pricing="1=0,0711, 10=0,0194, 25=0,0132, 100=0,0103, 250=0,0102, 500=0,0061 (USD)", RoHS=Yes, Stock=501, Supplier="Arrow Electronics", Supplier Part Number=RMCF1206JT510R
R11 R13: library part "RES 1K OHM 5% 1/4W 0603", "Res Thick Film 0603 1K Ohm 5% 0.25W(1/4W) ±200ppm/C Molded SMD Automotive Paper T/R", Case Code (Metric)=1608, Case Code (Imperial)=0603, Manufacturer=Rohm, Max Operating Temperature=155°C, Max Power Dissipation=250mW, Min Operating Temperature=-55°C, Ratings=AEC-Q200, Supplier Part Number=755-ESR03EZPJ102, Temperature Coefficient=200ppm/°C, Tolerance=5%, Voltage Rating=150V, Case/Package=0603, Category="Chip SMD Resistors", ComponentLink1Description=https://datasheet.ciiva.com/2469/esr-2469604.pdf?src-supplier=Digikey, ComponentLink1URL=https://datasheet.ciiva.com/2469/esr-2469604.pdf?src-supplier=Digikey, ComponentLink2Description=https://datasheet.ciiva.com/2469/esr-2469605.pdf?src-supplier=Digikey, ComponentLink2URL=https://datasheet.ciiva.com/2469/esr-2469605.pdf?src-supplier=Digikey, ComponentLink3Description=https://datasheet.ciiva.com/2469/esr-2469603.pdf?src-supplier=Digikey, ComponentLink3URL=https://datasheet.ciiva.com/2469/esr-2469603.pdf?src-supplier=Digikey, Features="Automotive AEC-Q200", Lead Free="Lead Free", Manufacturer Part Number=ESR03EZPJ102, Number of Terminations=2, Packaging="Cut Tape", Pricing="1=0,13, 10=0,044, 50=0,044, 100=0,026, 1000=0,021, 10000=0,014 (USD)", RoHS=Yes, RoHS Compliant=Yes, Series=ESR, Stock=869548, Supplier=Mouser, Voltage Rating (DC)=150V
RT1: library part NTC, "Icl 16 Ohm 20% 8.5MM", Case/Package=Radial, Current Rating=1.7A, Manufacturer="TDK EPCOS", Max Operating Temperature=170°C, Min Operating Temperature=-55°C, Package Quantity=1500, Power Rating=1.4W, Supplier Part Number=B57153S0160M051-ND, Tolerance=20%, ComponentLink1Description=http://www.mouser.com/ds/2/400/NTC_ICL_S153-525550.pdf?src-supplier=Mouser, ComponentLink1URL=http://www.mouser.com/ds/2/400/NTC_ICL_S153-525550.pdf?src-supplier=Mouser, Designed By="Arda B.", Diameter=8.5mm, Dissipation Factor=8%, Lead Diameter=0.6mm, Lead Pitch=5mm, Manufacturer Part Number=B57153S0160M051, Packaging="Tape and Reel", Pricing="3000=0,31856 (USD)", RoHS=Yes, RoHS Compliant=Yes, Series=S153, Supplier=Digikey, Width=6mm
RV1: library part "VARISTOR 470V 4.5KA DISC 14MM", "Epcos Standard Series Disc Varistor 300pF 4500A; Varistor 470V", Manufacturer="TDK EPCOS", Supplier Part Number=871-B72214S301K101, Category=Varistors, ComponentLink1Description=https://datasheet.ciiva.com/1278/1640466-1278043.pdf?src-supplier=Element14, ComponentLink1URL=https://datasheet.ciiva.com/1278/1640466-1278043.pdf?src-supplier=Element14, Designed By="Arda B.", Manufacturer Part Number=B72214S0301K101, Pricing="1=0,4, 10=0,318, 50=0,318, 100=0,318, 1000=0,197, 10000=0,197 (USD)", RoHS=Yes, Stock=22154, Supplier=Mouser
T1: library part "SMPS Tr EF25"
U1: library part "CMC 39MH 700MA 2LN TH", "Common Mode Chokes Dual 39mH 10kHz 700mA Thru-Hole Box", Current Rating=700mA, Manufacturer="TDK EPCOS", Max Operating Temperature=125°C, Min Operating Temperature=-40°C, Package Quantity=640, Supplier Part Number=495-2781-ND, Tolerance=50%, Voltage Rating (AC)=250V, Inductance Tolerance=-30%, Category=Uncategorized, ComponentLink1Description=https://datasheet.ciiva.com/4956/b82732r-w-58440-4956336.pdf?src-supplier=Mouser, ComponentLink1URL=https://datasheet.ciiva.com/4956/b82732r-w-58440-4956336.pdf?src-supplier=Mouser, Core Material=Ferrite, Designed By="Arda B.", Height=23mm, Length=24mm, Manufacturer Part Number=B82732R2701B030, Max Current Rating=700mA, Max DC Current=700mA, Mounting Technology="Through Hole", Number of Lines=2, Orientation=5495OrientationType, Packaging=Tray, Pins=4, Pricing="1=2,91, 10=2,475, 25=2,2812, 40=2,0385, 80=1,69875, 230=1,65017, 640=1,55309, 1280=1,45602, 2560=1,40749 (USD)", Reach SVHC Compliant=No, RoHS=Yes, RoHS Compliant=Yes, Series=B82732, Stock=1297, Supplier=Digikey, Termination=Radial, Weight=0.35274oz, Width=16.5mm
U2: library part "Bead 1206", "SMD 1206"
VR1: library part "AC-DC CONTROLLERS & REGULA", "Converter Offline Flyback Topology Up to 500kHz 8-SOIC", Manufacturer="ON Semiconductor", Manufacturer Part Number=UC3842BD1R2G, Supplier Part Number=UC3842BD1R2GOSTR-ND, Category="Voltage Regulators - Switching", ComponentLink1Description=https://datasheet.ciiva.com/2015/uc3842b-2015296.pdf?src-supplier=Digikey, ComponentLink1URL=https://datasheet.ciiva.com/2015/uc3842b-2015296.pdf?src-supplier=Digikey, ComponentLink2Description=https://datasheet.ciiva.com/2015/uc3842b-2015295.pdf?src-supplier=Digikey, ComponentLink2URL=https://datasheet.ciiva.com/2015/uc3842b-2015295.pdf?src-supplier=Digikey, ComponentLink3Description=https://datasheet.ciiva.com/2015/uc3842b-2015297.pdf?src-supplier=Digikey, ComponentLink3URL=https://datasheet.ciiva.com/2015/uc3842b-2015297.pdf?src-supplier=Digikey, ComponentLink4Description=https://datasheet.ciiva.com/4876/uc3842b-d-116980-4876037.pdf?src-supplier=Mouser, ComponentLink4URL=https://datasheet.ciiva.com/4876/uc3842b-d-116980-4876037.pdf?src-supplier=Mouser, ComponentLink5Description=https://datasheet.ciiva.com/8198/uc3842b-d-8198310.pdf?src-supplier=Avnet, ComponentLink5URL=https://datasheet.ciiva.com/8198/uc3842b-d-8198310.pdf?src-supplier=Avnet, Designed By="Arda B.", Pricing="2500=0,2367, 5000=0,22794, 12500=0,21917, 25000=0,217 (USD)", RoHS=Yes, Stock=7500, Supplier=Digikey

## Nets (pads, with @x,y where several pads share a name; then routed paths per layer and width w, separated by ;. In a path a pad name is that pad's centre, name@x,y a point inside that pad or via, vN(x,y) a via of type N, cw(c..) or ccw(c..) an arc to the next point about the centre after c; other vN are vias at no path point)
5V: C11.1 Q2.3 R9.2 VR1.8
15V: C9.2 U2.1 VR1.7
15V_Kontrol: C2.2 C3.2 D1.2 J1.1 R1.2 R10.2 R12.2
D(+): C1.1 C5.1 C6.2 D2.2 D3.1 D4.2 R6.1 T1.1
E: C5.2 C6.1 C7.1 C8.2 C9.1 C10.2 C11.2 C13.1 C14.1 D7.1 D8.1 R4.1 R5.1 R13.1 T1.4 VR1.5
GATE: R2.1 VR1.6
GND: C1.2 C2.1 C3.1 D11.1 J1.2 R1.1 T1.8
Iolc: D6.1 Q1.S R3.1 R4.2 R5.2 R11.1
NetC4_1: C4.1 J2.1 RV1.1 U1.2
NetC4_2: C4.2 RT1.2 U1.1
NetC7_2: C7.2 C8.1 D9.2 R8.2 U2.2
NetC10_1: C10.1 R9.1 VR1.4
NetC12_2: C12.2 R14.2 VR1.1
NetC13_2: C13.2 R11.2 VR1.3
NetD1_1: D1.1 T1.10
NetD2_1: D2.1 D8.2 U1.3
NetD3_2: D3.2 D5.2
NetD4_1: D4.1 D7.2 U1.4
NetD5_1: D5.1 Q1.D T1.2
NetD6_2: D6.2 Q1.G R2.2 R3.2
NetD9_1: D9.1 T1.3
NetD10_1: D10.1 D11.2
NetD10_2: D10.2 Q2.1 R12.1
NetJ2_2: J2.2 RT1.1 RV1.2
NetQ2_2: Q2.2 R10.1
NetR6_2: R6.2 R7.1
NetR7_2: R7.2 R8.1
Vfb: C12.1 C14.2 Q2.4 R13.2 R14.1 VR1.2
pads on no net: T1.0

## Keep-outs
Keep-Out Layer:
  the board outline again, w0.2

## Silkscreen, mask and mechanical layers (free items; w line width, h text height)
Top Overlay:
  circle w0.2: c82.169,3.175 r3
  circle w0.2: c82.931,37.719 r3
  circle w0.2: c4.445,31.877 r3
  circle w0.2: c19.304,5.842 r3